# EAGLE board homeboard2 (EAGLE 6.0)
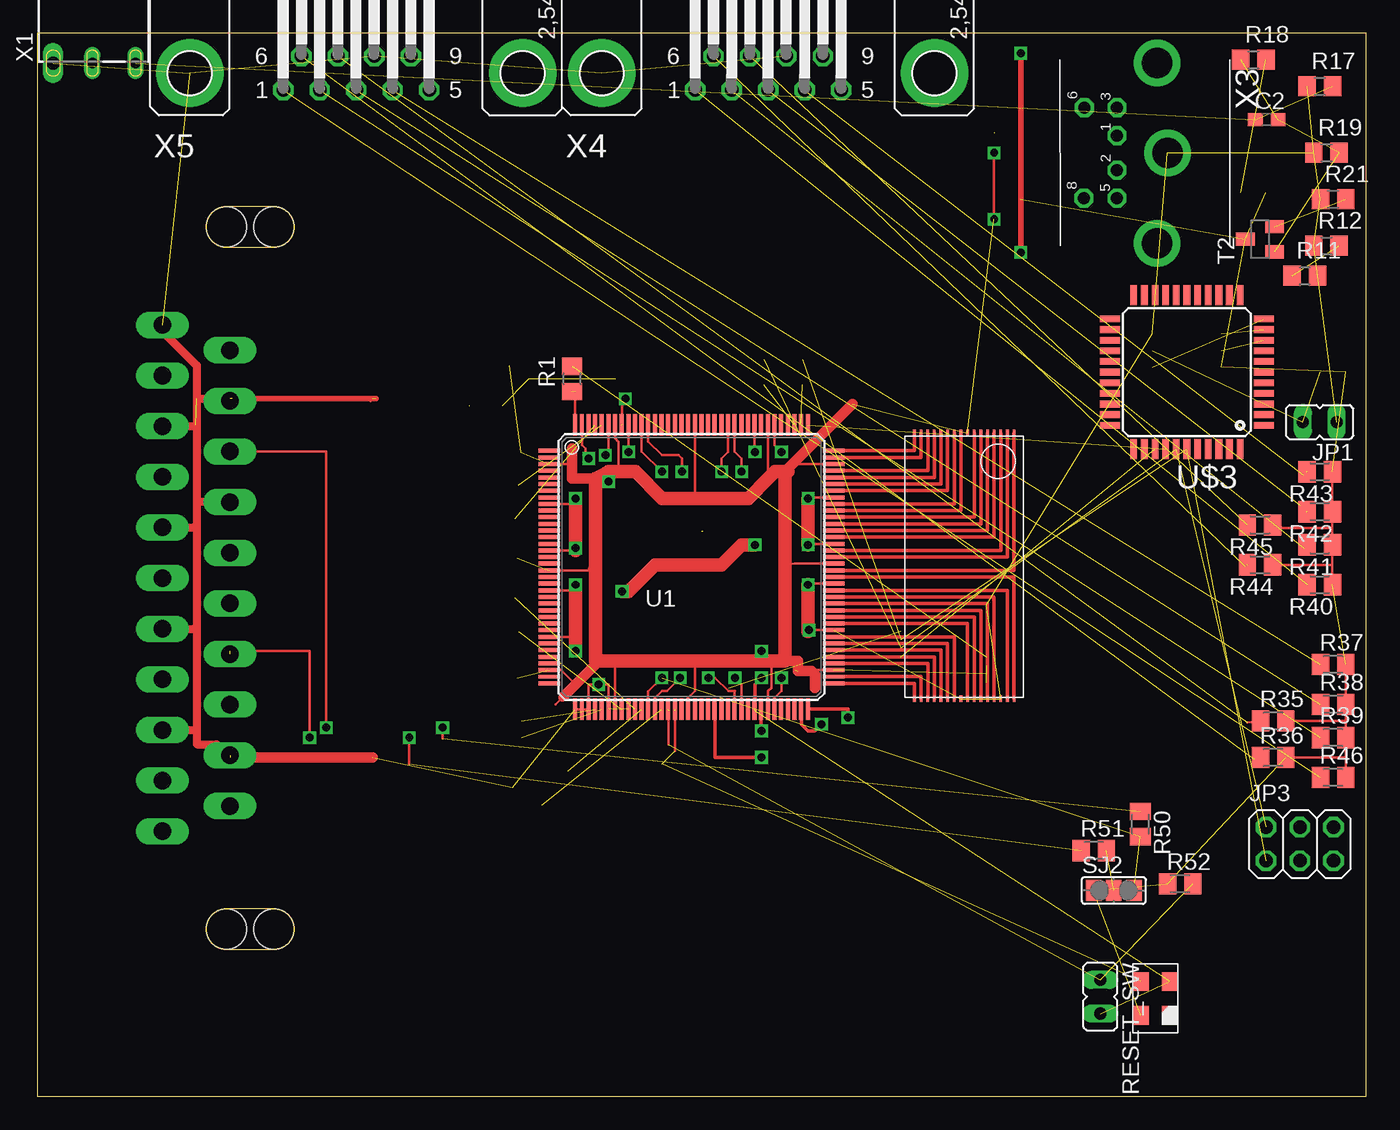
[diagram p0: board, top side]
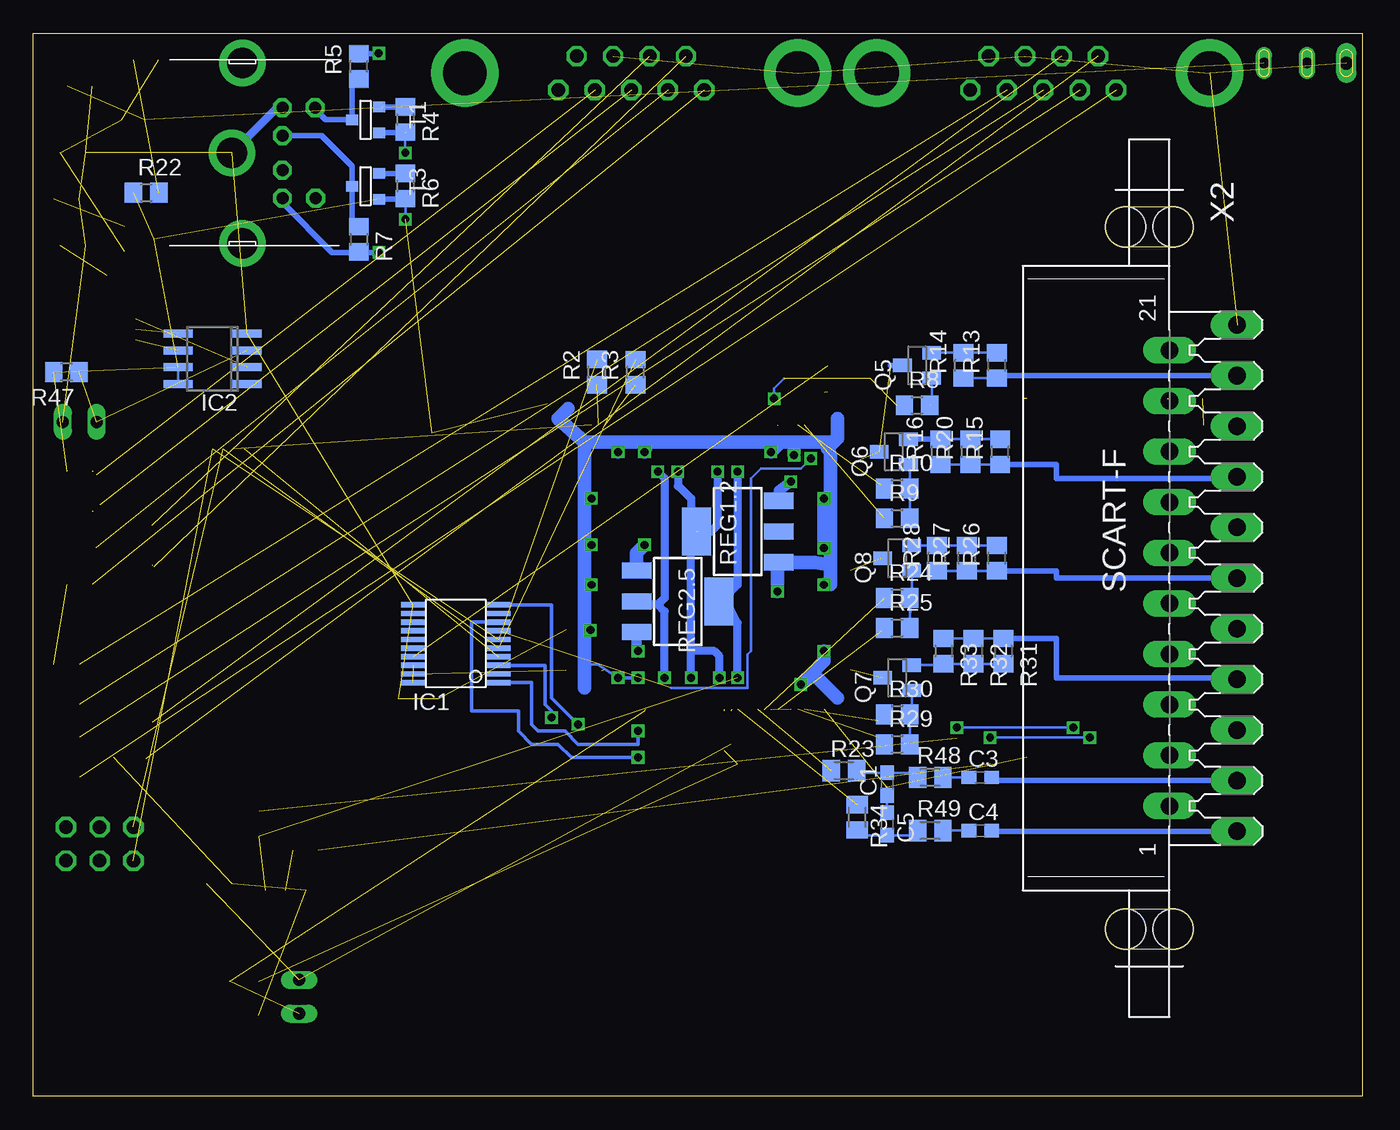
[diagram p1: board, bottom side, seen from below]

Size 100 x 80 mm. Coordinates in mm from the lower left corner, seen from the top.
Outline: 0,0 100,0 100,80 0,80 0,0
Copper layers (1*16): Top 0.0356mm / dielectric 1.5011mm / Bottom 0.0356mm
Design rules: minimum track width 6mil, minimum drill 13mil, track to track 6mil, track to pad 6mil, pad to pad 6mil, via to via 6mil, smd to smd 6mil, copper to edge 15mil, drill to drill 6mil, minimum pad ring 7mil, minimum via ring 7mil, stop-mask expansion 4mil, vias tented up to drill 0mil, thermal gap 10mil
Net classes: 1 power: width 0.6 mm, drill 1.1 mm, clearance 0.4 mm

## Footprints (pad centres in the part's own frame; a part is rotated, then mirrored left to right if it is on the bottom)
C0603 = smd 1.1 x 1: 1 -0.85,0; 2 0.85,0
VO20 = smd 0.4 x 1.8: 1 5.85,6.15; 2 5.2,6.15; 3 4.55,6.15; 4 3.9,6.15; 5 3.25,6.15; 6 2.6,6.15; 7 1.95,6.15; 8 1.3,6.15; 9 0.65,6.15; 10 0,6.15; 11 0,-0.3; 12 0.65,-0.3; 13 1.3,-0.3; 14 1.95,-0.3; 15 2.6,-0.3; 16 3.25,-0.3; 17 3.9,-0.3; 18 4.55,-0.3; 19 5.2,-0.3; 20 5.85,-0.3
SO-08 = smd 0.6 x 2.2: 1 -1.905,-2.6; 2 -0.635,-2.6; 3 0.635,-2.6; 4 1.905,-2.6; 5 1.905,2.6; 6 0.635,2.6; 7 -0.635,2.6; 8 -1.905,2.6
JP1 = drill 0.914 long: 1 0,-1.27; 2 0,1.27
2X03 = drill 1.016 octagon: 1 -2.54,-1.27; 2 -2.54,1.27; 3 0,-1.27; 4 0,1.27; 5 2.54,-1.27; 6 2.54,1.27
SOT23 = smd 1 x 1.4: 1 -0.95,-1.1; 2 0.95,-1.1; 3 0,1.1
R0805 = smd 1.3 x 1.5: 1 -0.95,0; 2 0.95,0
M0805 = smd 1.3 x 1.6: 1 -0.95,0; 2 0.95,0
SOT223 = smd 1.219 x 2.235: 1 -2.311,-3.099; 2 0,-3.099; 3 2.311,-3.099 | smd 3.6 x 2.2: 4 0,3.099
SJ_2 = smd 1.168 x 1.6: 1 -1.524,0; 2 0,0; 3 1.524,0
SOT-23 = smd 0.787 x 0.889: 1 0.025,-1.016; 2 -0.94,1.016; 3 0.991,1.016
TQ144 = smd 1.6 x 0.3: P1 -10.7,8.75; P2 -10.7,8.25; P3 -10.7,7.75; P4 -10.7,7.25; P5 -10.7,6.75; P6 -10.7,6.25; P7 -10.7,5.75; P8 -10.7,5.25; P9 -10.7,4.75; P10 -10.7,4.25; P11 -10.7,3.75; P12 -10.7,3.25; P13 -10.7,2.75; P14 -10.7,2.25; P15 -10.7,1.75; P16 -10.7,1.25; P17 -10.7,0.75; P18 -10.7,0.25; P19 -10.7,-0.25; P20 -10.7,-0.75; P21 -10.7,-1.25; P22 -10.7,-1.75; P23 -10.7,-2.25; P24 -10.7,-2.75; P25 -10.7,-3.25; P26 -10.7,-3.75; P27 -10.7,-4.25; P28 -10.7,-4.75; P29 -10.7,-5.25; P30 -10.7,-5.75; P31 -10.7,-6.25; P32 -10.7,-6.75; P33 -10.7,-7.25; P34 -10.7,-7.75; P35 -10.7,-8.25; P36 -10.7,-8.75; P73 10.7,-8.75; P74 10.7,-8.25; P75 10.7,-7.75; P76 10.7,-7.25; P77 10.7,-6.75; P78 10.7,-6.25; P79 10.7,-5.75; P80 10.7,-5.25; P81 10.7,-4.75; P82 10.7,-4.25; P83 10.7,-3.75; P84 10.7,-3.25; P85 10.7,-2.75; P86 10.7,-2.25; P87 10.7,-1.75; P88 10.7,-1.25; P89 10.7,-0.75; P90 10.7,-0.25; P91 10.7,0.25; P92 10.7,0.75; P93 10.7,1.25; P94 10.7,1.75; P95 10.7,2.25; P96 10.7,2.75; P97 10.7,3.25; P98 10.7,3.75; P99 10.7,4.25; P100 10.7,4.75; P101 10.7,5.25; P102 10.7,5.75; P103 10.7,6.25; P104 10.7,6.75; P105 10.7,7.25; P106 10.7,7.75; P107 10.7,8.25; P108 10.7,8.75 | smd 0.3 x 1.6: P37 -8.75,-10.7; P38 -8.25,-10.7; P39 -7.75,-10.7; P40 -7.25,-10.7; P41 -6.75,-10.7; P42 -6.25,-10.7; P43 -5.75,-10.7; P44 -5.25,-10.7; P45 -4.75,-10.7; P46 -4.25,-10.7; P47 -3.75,-10.7; P48 -3.25,-10.7; P49 -2.75,-10.7; P50 -2.25,-10.7; P51 -1.75,-10.7; P52 -1.25,-10.7; P53 -0.75,-10.7; P54 -0.25,-10.7; P55 0.25,-10.7; P56 0.75,-10.7; P57 1.25,-10.7; P58 1.75,-10.7; P59 2.25,-10.7; P60 2.75,-10.7; P61 3.25,-10.7; P62 3.75,-10.7; P63 4.25,-10.7; P64 4.75,-10.7; P65 5.25,-10.7; P66 5.75,-10.7; P67 6.25,-10.7; P68 6.75,-10.7; P69 7.25,-10.7; P70 7.75,-10.7; P71 8.25,-10.7; P72 8.75,-10.7; P109 8.75,10.7; P110 8.25,10.7; P111 7.75,10.7; P112 7.25,10.7; P113 6.75,10.7; P114 6.25,10.7; P115 5.75,10.7; P116 5.25,10.7; P117 4.75,10.7; P118 4.25,10.7; P119 3.75,10.7; P120 3.25,10.7; P121 2.75,10.7; P122 2.25,10.7; P123 1.75,10.7; P124 1.25,10.7; P125 0.75,10.7; P126 0.25,10.7; P127 -0.25,10.7; P128 -0.75,10.7; P129 -1.25,10.7; P130 -1.75,10.7; P131 -2.25,10.7; P132 -2.75,10.7; P133 -3.25,10.7; P134 -3.75,10.7; P135 -4.25,10.7; P136 -4.75,10.7; P137 -5.25,10.7; P138 -5.75,10.7; P139 -6.25,10.7; P140 -6.75,10.7; P141 -7.25,10.7; P142 -7.75,10.7; P143 -8.25,10.7; P144 -8.75,10.7
TSOP32 = smd 0.5 x 0.2: P1 -9.75,3.75; P2 -9.75,3.25; P3 -9.75,2.75; P4 -9.75,2.25; P5 -9.75,1.75; P6 -9.75,1.25; P7 -9.75,0.75; P8 -9.75,0.25; P9 -9.75,-0.25; P10 -9.75,-0.75; P11 -9.75,-1.25; P12 -9.75,-1.75; P13 -9.75,-2.25; P14 -9.75,-2.75; P15 -9.75,-3.25; P16 -9.75,-3.75; P17 10.25,-3.75; P18 10.25,-3.25; P19 10.25,-2.75; P20 10.25,-2.25; P21 10.25,-1.75; P22 10.25,-1.25; P23 10.25,-0.75; P24 10.25,-0.25; P25 10.25,0.25; P26 10.25,0.75; P27 10.25,1.25; P28 10.25,1.75; P29 10.25,2.25; P30 10.25,2.75; P31 10.25,3.25; P32 10.25,3.75
OSC_7C = smd 1.4 x 1.2: ENA -1.27,-1.1; GND 1.27,-1.1; OUT 1.27,1.1; VDD -1.27,1.1
TQFP44 = smd 1.5 x 0.5: 1 -5.8,4; 2 -5.8,3.2; 3 -5.8,2.4; 4 -5.8,1.6; 5 -5.8,0.8; 6 -5.8,0; 7 -5.8,-0.8; 8 -5.8,-1.6; 9 -5.8,-2.4; 10 -5.8,-3.2; 11 -5.8,-4; 23 5.8,-4; 24 5.8,-3.2; 25 5.8,-2.4; 26 5.8,-1.6; 27 5.8,-0.8; 28 5.8,0; 29 5.8,0.8; 30 5.8,1.6; 31 5.8,2.4; 32 5.8,3.2; 33 5.8,4 | smd 0.5 x 1.5: 12 -4,-5.8; 13 -3.2,-5.8; 14 -2.4,-5.8; 15 -1.6,-5.8; 16 -0.8,-5.8; 17 0,-5.8; 18 0.8,-5.8; 19 1.6,-5.8; 20 2.4,-5.8; 21 3.2,-5.8; 22 4,-5.8; 34 4,5.8; 35 3.2,5.8; 36 2.4,5.8; 37 1.6,5.8; 38 0.8,5.8; 39 0,5.8; 40 -0.8,5.8; 41 -1.6,5.8; 42 -2.4,5.8; 43 -3.2,5.8; 44 -4,5.8
1503_04 = drill 0.8 pad 1.2 long: 1 3.9,-10.25; 2 0.65,-10.25 | drill 1 pad 1.2 long: 3 -2.3,-10.25 | hole 1.6: 0,0
SCART-F = drill 1.321 long: 1 19.05,5.08; 2 17.145,0; 3 15.24,5.08; 4 13.335,0; 5 11.43,5.08; 6 9.525,0; 7 7.62,5.08; 8 5.715,0; 9 3.81,5.08; 10 1.905,0; 11 0,5.08; 12 -1.905,0; 13 -3.81,5.08; 14 -5.715,0; 15 -7.62,5.08; 16 -9.525,0; 17 -11.43,5.08; 18 -13.335,0; 19 -15.24,5.08; 20 -17.145,0; 21 -19.05,5.08 | hole 3.023: 26.416,0.254; 26.416,-3.302; -26.416,0.254; -26.416,-3.302
M_DIN6 = drill 0.9 pad 1.422 octagon: 1 -1.3,-3.75; 2 1.3,-3.75; 3 -3.4,-3.75; 5 3.4,-3.75; 6 -3.4,-6.2; 8 3.4,-6.25 | drill 2.3 pad 3.5: SH1 6.8,-0.75; SH2 0,0.05; SH3 -6.75,-0.75
F09HP = drill 1.016 octagon: 1 -5.486,-1.27; 2 -2.743,-1.27; 3 0,-1.27; 4 2.743,-1.27; 5 5.486,-1.27; 6 -4.115,1.27; 7 -1.372,1.27; 8 1.372,1.27; 9 4.115,1.27 | drill 3.302 pad 5.08: G1 -12.522,0; G2 12.522,0

## Placement (x,y rotation side)
C1  [C0603]  35.75,23.5 90 bottom
C2  100nF  [C0603]  92.5,73.5 0 top
C3  [C0603]  28.75,24 0 bottom
C4  [C0603]  28.75,20 0 bottom
C5  [C0603]  35.75,20.5 270 bottom
IC1  XCF02S  [VO20]  71.13,36.98 270 bottom
IC2  25LC080SN  [SO-08]  86.5,55.5 90 bottom
JP1  [JP1]  96.5,50.75 90 top
JP3  [2X03]  95,19 0 top
Q5  BC848SMD  [SOT23]  33.5,55 90 bottom
Q6  BC848SMD  [SOT23]  35.25,48.5 90 bottom
Q7  BC848SMD  [SOT23]  35,31.5 90 bottom
Q8  BC848SMD  [SOT23]  35,40.5 90 bottom
R1  100  [R0805]  40.25,53.99 90 top
R2  100  [R0805]  57.58,54.5 90 bottom
R3  100  [R0805]  54.68,54.49 90 bottom
R4  1000  [R0805]  72,73.5 270 bottom
R5  1000  [R0805]  75.5,77.5 90 bottom
R6  1000  [R0805]  72,68.5 270 bottom
R7  1000  [R0805]  75.5,64.5 270 bottom
R8  2200  [R0805]  33.5,52 0 bottom
R9  2200  [R0805]  35,43.5 0 bottom
R10  1000  [R0805]  35,45.75 0 bottom
R11  75  [R0805]  95.38,61.75 0 top
R12  750  [R0805]  97,64 0 top
R13  680  [R0805]  27.5,55 90 bottom
R14  2200  [R0805]  30,55 90 bottom
R15  270  [R0805]  27.25,48.5 90 bottom
R16  680  [R0805]  31.75,48.5 90 bottom
R17  10000  [R0805]  96.5,76 0 top
R18  4700  [R0805]  91.5,78 0 top
R19  10000  [R0805]  97,71 0 top
R20  4700  [R0805]  29.5,48.5 90 bottom
R21  47000  [R0805]  97.5,67.5 0 top
R22  1000  [R0805]  91.5,68 0 bottom
R23  [M0805]  39,24.5 0 bottom
R24  2200  [R0805]  35,37.5 0 bottom
R25  1000  [R0805]  35,35.25 0 bottom
R26  270  [R0805]  27.5,40.5 90 bottom
R27  680  [R0805]  29.75,40.5 90 bottom
R28  4700  [R0805]  32,40.5 90 bottom
R29  2200  [R0805]  35,26.5 0 bottom
R30  1000  [R0805]  35,28.75 0 bottom
R31  270  [R0805]  27,33.5 270 bottom
R32  680  [R0805]  29.25,33.5 270 bottom
R33  4700  [R0805]  31.5,33.5 270 bottom
R34  [M0805]  38,21 270 bottom
R35  [M0805]  93,28.25 0 top
R36  [M0805]  93,25.5 0 top
R37  [M0805]  97.5,32.5 0 top
R38  [M0805]  97.5,29.5 0 top
R39  [M0805]  97.5,27 0 top
R40  [M0805]  96.5,38.5 180 top
R41  [M0805]  96.5,41.5 180 top
R42  [M0805]  96.5,44 180 top
R43  [M0805]  96.5,47 180 top
R44  [M0805]  92,40 180 top
R45  [M0805]  92,43 180 top
R46  [M0805]  97.5,24 0 top
R47  4K7  [R0805]  97.5,54.5 180 bottom
R48  [M0805]  32.5,24 0 bottom
R49  [M0805]  32.5,20 0 bottom
R50  2k2  [M0805]  83,20.5 270 top
R51  2k2  [M0805]  79.5,18.5 0 top
R52  4K7  [M0805]  86,16 0 top
REG1.2  1.2V  [SOT223]  47,42.5 90 bottom
REG2.5  2.5V  [SOT223]  51.5,37.25 270 bottom
RESET_SW  [JP1]  80,7.5 180 top
SJ2  [SJ_2]  81,15.5 0 top
T1  BSS138  [SOT-23]  75,73.5 270 bottom
T2  BC848  [SOT23]  92,64.5 90 top
T3  BSS138  [SOT-23]  75,68.5 270 bottom
U1  XC3S400TQ144  [TQ144]  49.23,39.83 0 top
U$1  AS6C4008  [TSOP32]  69.75,40.17 270 top
U$2  TXO_7C  [OSC_7C]  84.12,7.38 90 top
U$3  ATMEGA32U4-AU  [TQFP44]  86.5,54.5 180 top
X1  1503_04  [1503_04]  3.5,88 0 top
X2  SCART-F  [SCART-F]  14.5,39 270 bottom
X3  [M_DIN6]  85,71 270 top
X4  [F09HP]  55,77 0 top
X5  [F09HP]  24,77 0 top

## Library data of the parts
C1-C5 R23 R34-R46 R48-R52 = resistor
IC1 = smd-special
IC2 = microchip; MF: MICROCHIP; MPN: 25LC080/SN; OC_FARNELL: 1137302; OC_NEWARK: 96K4092
JP1 RESET_SW SJ2 = jumper
JP3 = pinhead
Q5-Q8 = bc548
R1-R22 R24-R33 R47 = rcl
REG1.2 REG2.5 U$1 U$2 = cpcfpga
T1 T3 = zetex; OC_FARNELL: unknown; OC_NEWARK: unknown
T2 = transistor
U1 = xilinx_spartan3_virtex4_and_5
U$3 = adafruit
X1 = con-lumberg; OC_FARNELL: 1216981; OC_NEWARK: unknown
X2 = con-hirschmann; OC_FARNELL: unknown; OC_NEWARK: unknown
X3 = mini_din
X4 X5 = con-subd; OC_FARNELL: unknown; OC_NEWARK: unknown

## Nets
AINLEFT: X2.6
AINRIGHT: X2.2
B0: R30.1 U1.P40
B1: R29.1 U1.P41
CASIN: R21.2 T2.2
CLK_5V: R5.1 T1.1 X3.6
COMPIN: X2.20
CSYNC: R8.1 U1.P137
D_FASTBLANKING: R11.1 R12.2
DATA_5V: R7.1 T3.1 X3.1
FPGA_AUDIO_LEFT: R23.1 U1.P47
FPGA_AUDIO_RIGHT: R34.1 U1.P50
G0: R25.1 U1.P44
G1: R24.1 U1.P46
GND: C1.1 C5.1 IC1.11 IC2.4 JP1.1 R12.1 R17.1 R19.1 R21.1 REG1.2.1 REG2.5.1 RESET_SW.2 U1.P9 U1.P16 U1.P22 U1.P29 U1.P37 U1.P38 U1.P39 U1.P42 U1.P45 U1.P64 U1.P67 U1.P81 U1.P88 U1.P94 U1.P101 U1.P114 U1.P117 U1.P136 U1.P139 U$1.P24 U$1.P30 U$2.GND X1.3 X2.4 X2.5 X2.9 X2.13 X2.14 X2.17 X2.18 X2.21 X3.3 X3.SH2 X4.8 X4.G1 X5.8 X5.G1
MISO: IC2.2 U$3.11
MOSI: IC2.5 U$3.10
N$1: U1.P108 U$1.P16
N$2: U1.P107 U$1.P15
N$3: U1.P105 U$1.P14
N$4: U1.P104 U$1.P13
N$5: U1.P103 U$1.P12
N$6: U1.P102 U$1.P11
N$7: U1.P100 U$1.P10
N$8: U1.P99 U$1.P9
N$9: U1.P98 U$1.P7
N$10: U1.P97 U$1.P6
N$11: U1.P96 U$1.P5
N$12: U1.P95 U$1.P4
N$13: U1.P93 U$1.P3
N$14: U1.P92 U$1.P2
N$15: U1.P90 U$1.P1
N$16: U1.P73 U$1.P17
N$17: U1.P74 U$1.P18
N$18: U1.P76 U$1.P19
N$19: U1.P77 U$1.P20
N$20: U1.P78 U$1.P21
N$21: U1.P79 U$1.P22
N$22: U1.P80 U$1.P23
N$23: U1.P82 U$1.P25
N$24: U1.P83 U$1.P26
N$25: U1.P84 U$1.P27
N$26: U1.P85 U$1.P28
N$27: U1.P86 U$1.P29
N$28: U1.P87 U$1.P31
N$29: U1.P89 U$1.P32
N$30: R35.1 X5.7
N$31: R36.1 X5.6
N$32: R37.1 X5.4
N$33: R38.1 X5.3
N$34: R39.1 X5.2
N$35: IC1.3 U1.P72
N$36: IC1.17 R1.2
N$37: R46.1 X5.1
N$38: IC1.10 U1.P71
N$39: R2.1 U1.P110
N$40: IC1.7 U1.P143
N$41: R40.2 X4.1
N$42: R1.1 U1.P144
N$43: R3.1 U1.P111
N$44: R41.2 X4.2
N$45: R42.2 X4.3
N$46: R43.2 X4.4
N$47: R44.2 X4.6
N$48: R45.2 X4.7
N$49: IC2.3 JP1.2 R47.1
N$50: U1.P52 U$2.OUT
N$51: C1.2 R23.2 R48.1
N$52: C3.1 R48.2
N$53: Q6.1 R9.2 R10.2
N$54: Q6.2 R15.2 R16.2 R20.2
N$55: Q8.1 R24.2 R25.2
N$56: Q8.2 R26.2 R27.2 R28.2
N$57: Q7.1 R29.2 R30.2
N$58: Q7.2 R31.2 R32.2 R33.2
N$59: Q5.2 R13.2 R14.2
N$60: C2.2 R18.1 R19.2 T2.1
N$61: C2.1 R17.2 X1.1
N$62: R18.2 R22.2
N$63: Q5.1 R8.2
N$64: C4.1 R49.2
N$65: C5.2 R34.2 R49.1
N$66: R51.2 SJ2.2
N$67: U1.P26
N$68: JP3.3
N$69: JP3.5
N$70: JP3.6
N$72: JP3.4
N$73: U1.P12
PE1: X3.SH1
PE3: X3.SH3
PROM_DO: IC1.1 U1.P65
PROM_INITB: IC1.8 U1.P58
PS2CLK: R4.1 T1.2
PS2DAT: R6.1 T3.2
R0: R10.1 U1.P140
R1: R9.1 U1.P141
RESET: R52.2 RESET_SW.1 U1.P51
SCART_BLANKING: R50.1 X2.16
SCART_BLUE: R31.1 R32.1 R33.1 X2.7
SCART_COMP: R13.1 R14.1 X2.19
SCART_GREEN: R26.1 R27.1 R28.1 X2.11
SCART_LEFT: C3.2 X2.3
SCART_MODE: R51.1 X2.8
SCART_RED: R15.1 R16.1 R20.1 X2.15
SCART_RIGHT: C4.2 X2.1
SCLK: IC2.6 U$3.9
SPI_SEL0: IC2.1
SPI_SEL1: U$3.8
TCK: IC1.6 JP3.1 R2.2 U$3.39
TDI: IC1.4 U$3.36
TDO: U1.P109 U$3.37
TMS: IC1.5 JP3.2 R3.2 U$3.38
VCC: IC1.18 IC1.19 IC1.20 IC2.7 IC2.8 Q5.3 Q6.3 Q7.3 Q8.3 R4.2 R6.2 R22.1 R35.2 R36.2 R37.2 R38.2 R39.2 R40.1 R41.1 R42.1 R43.1 R44.1 R45.1 R46.2 R47.2 R52.1 REG1.2.3 REG2.5.3 SJ2.1 T1.3 T2.3 T3.3 U1.P3 U1.P19 U1.P34 U1.P43 U1.P54 U1.P66 U1.P75 U1.P91 U1.P106 U1.P115 U1.P126 U1.P138 U$1.P8 U$2.VDD
VCC_5V: R5.2 R7.2 X3.5
VCC_B3: R11.2
VCCAUX: R50.2 REG2.5.4 SJ2.3 U1.P48 U1.P134
VCCAUX_R: REG2.5.2 U1.P62 U1.P120
VCCINT: REG1.2.4 U1.P49 U1.P61 U1.P121 U1.P133

## Tracks (layer width: path | path; a pad name or v marks a point on that pad's centre or on a via)
B0  (1 unrouted)
  Bottom 0.2: 35.95,28.5 R30.1 36.45,28.25
B1  (1 unrouted)
  Bottom 0.2: 36.45,27 R29.1 35.95,27
CASIN  (1 unrouted)
CLK_5V
  Bottom 0.3: 76.02,76.03 R5.1
  Bottom 0.4: X3.6 78.8,74.3 78,73.5 76.04,73.5 T1.1 76.02,76.03
CSYNC  (via drill 0.6)  (3 unrouted)
  Top 0.2: 44,50.5 44,52.25 v44.25,52.5
  Bottom 0.2: 34.45,52.5 R8.1 35,52 | 43.5,54 44.25,53.25 v44.25,52.5
D_FASTBLANKING  (1 unrouted)
DATA_5V
  Bottom 0.4: R7.1 76.02,65.97 T3.1 76,68.49 76,70 78.3,72.3 X3.1
FPGA_AUDIO_LEFT  (1 unrouted)
FPGA_AUDIO_RIGHT  (1 unrouted)
G0  (1 unrouted)
  Bottom 0.2: 36.2,35 R25.1
G1  (1 unrouted)
GND  (via drill 0.6)  (26 unrouted)
  Top 0.2: U1.P9 40.5,44.58 40.5,44.5 | U1.P16 40.5,41.08 40.5,41 | U1.P22 40.5,38.08 40.5,38 | U1.P29 40.5,34.58 | U1.P37 U1.P38 U1.P39 41.5,29.16 41.5,31 v42.25,31 43,31 | 43,29.16 U1.P42 42.98,30.98 | U1.P136 44.5,50.51 v44.5,48.5 | U1.P139 42.98,48.48 v42.75,48.25 | 25.09,52.34 25.25,52.5 | U1.P101 58.08,45.08 v58,45 | U1.P88 58.08,38.58 v58,38.5 | U1.P81 v58.08,35.08 58,35 | U1.P94 58.08,41.58 v58,41.5 | U1.P117 53.98,48.52 v54,48.5 | U1.P114 55.48,49.02 v56,48.5 | U1.P67 55.48,29.98 56,30.5 v56,31.5
  Top 0.254: 54,29 54,31 v54.5,31.5
  Top 0.4: X2.21 9.42,57.58 | 12.21,44.72 12,44.5 | 25.5,52.5 14.66,52.5
  Top 0.406: 11.81,42.81 12,43 | 11.81,35.19 12,35 | 11.93,50.43 11.93,50.5 11.86,50.43 | 11.93,27.57 12,27.5
  Top 0.6: 9.42,57.58 12,55 12,52.5 | 12,52.5 12,44.5 12,43 12,35 12,27.5 12,26.5 13.5,26.5 14.5,25.5 | X2.13 11.81,42.81 | X2.9 11.81,35.19 | X2.17 11.86,50.43 | X2.5 11.93,27.57 | 40.5,44.58 v40.5,45 | X2.14 12.21,44.72 | 12,52.5 14.5,52.5
  Top 0.8: 40.5,41 v40.5,41.25 | v40.5,38.5 40.5,38 | 14.5,25.5 25.25,25.5 | 14.66,52.5 X2.18
  Top 1: 40.5,38 40.5,34.58 v40.5,33.5 | 40.5,41.08 40.5,44.5 | v54,41.5 53,41.5 51.5,40 46.5,40 44.5,38 v44,38 | v58,45 v58,41.5 | v58,38.5 58,35
  Bottom 0.2: 35.75,21.75 35.5,21.5 36,21.5 35.85,21.35 C5.1 C1.1 35.75,23.25 | v58,45 58.5,44.25 | v58,38.5 58.5,38.25 | v58,41.5 58.5,41.25 | v58.08,35.08 58.42,35.08 58.5,34.75 | v56,31.5 57.5,32.5 58.5,32.5 | 42.75,48.75 43,49.25
  Bottom 0.254: v54.5,31.5 v56,31.5
  Bottom 0.6: X3.3 81.65,74.4 X3.SH2 | 41.25,31.75 41.5,31.75
  Bottom 0.8: 44,40.09 REG1.2.1 | 40,49.25 40,48.25 40.25,48.75
  Bottom 1: v40.5,41.25 40,45.5 | 40,45 40,41.25 | v40.5,41.25 40,41.25 | 40,41.25 40,40 | 40,40 40,38.5 v40.5,38.5 | v42.25,31 41.5,31.75 40.5,32.75 v40.5,33.5 | 40,45 v40.5,45 v40.5,41.25 | 40,45 40,45.5 | 40,45.5 40,48.25 | 40,49.25 43,49.25 43.75,49.25 | 39.5,30 41.25,31.75 | REG1.2.1 41.19,40.19 40,40 | REG2.5.1 54.6,40.9 v54,41.5 | v44,38 44,40.09 | 53.75,49.25 43.75,49.25 | 43.75,49.25 v44.5,48.5 | 56,49.25 58.5,49.25 | 58.5,49.25 58.5,44.25 58.5,41.25 58.5,38.25 58.5,34.75 58.5,32.5 58.5,30.75 | v54,48.5 53.75,49.25 | 53.75,49.25 56,49.25 | 56,49.25 v56,48.5 | 58.5,49.25 60.5,51 59.75,51.75 | v42.75,48.25 42.75,48.75 | 39.5,51 39.5,49.5 40.25,48.75
MISO  (1 unrouted)
MOSI  (1 unrouted)
N$1
  Top 0.254: U1.P108 66,48.58 U$1.P16
N$2
  Top 0.254: U1.P107 66.5,48.08 U$1.P15
N$3
  Top 0.254: U1.P105 67,47.08 U$1.P14
N$4
  Top 0.254: U1.P104 67.5,46.58 U$1.P13
N$5
  Top 0.254: U1.P103 68,46.08 U$1.P12
N$6
  Top 0.254: U1.P102 68.5,45.58 U$1.P11
N$7
  Top 0.254: U1.P100 69,44.58 U$1.P10
N$8
  Top 0.254: U1.P99 69.5,44.08 U$1.P9
N$9
  Top 0.254: U1.P98 70.5,43.58 U$1.P7
N$10
  Top 0.254: U1.P97 71,43.08 U$1.P6
N$11
  Top 0.254: U1.P96 71.5,42.58 U$1.P5
N$12
  Top 0.254: U1.P95 72,42.08 U$1.P4
N$13
  Top 0.254: U1.P93 72.5,41.08 U$1.P3
N$14
  Top 0.254: U1.P92 73,40.58 U$1.P2
N$15
  Top 0.254: U1.P90 73.5,39.58 U$1.P1
N$16
  Top 0.254: U1.P73 66,31.08 U$1.P17
N$17
  Top 0.254: U1.P74 66.5,31.58 U$1.P18
N$18
  Top 0.254: U1.P76 67,32.58 U$1.P19
N$19
  Top 0.254: U1.P77 67.5,33.08 U$1.P20
N$20
  Top 0.254: U1.P78 68,33.58 U$1.P21
N$21
  Top 0.254: U1.P79 68.5,34.08 U$1.P22
N$22
  Top 0.254: U1.P80 69,34.58 U$1.P23
N$23
  Top 0.254: U1.P82 70,35.58 U$1.P25
N$24
  Top 0.254: U1.P83 70.5,36.08 U$1.P26
N$25
  Top 0.254: U1.P84 71,36.58 U$1.P27
N$26
  Top 0.254: U1.P85 71.5,37.08 U$1.P28
N$27
  Top 0.254: U1.P86 72,37.58 U$1.P29
N$28
  Top 0.254: U1.P87 73,38.08 U$1.P31
N$29
  Top 0.254: U1.P89 73.5,39.08 U$1.P32
N$30  (1 unrouted)
  Top 0.2: 91.05,28.13 R35.1
N$31  (1 unrouted)
  Top 0.2: 91.55,25.39 R36.1
N$32  (1 unrouted)
N$33  (1 unrouted)
N$34  (1 unrouted)
  Top 0.2: 96.55,26.88 R39.1
N$35  (via drill 0.6)
  Top 0.2: 58,29.16 U1.P72
  Top 0.254: 58,29.16 61,29.16 v61,28.5
  Bottom 0.254: v61,28.5 61,29 61.5,29.5 61.5,32.43 IC1.3
N$36  (1 unrouted)
N$37  (1 unrouted)
N$38  (via drill 0.6)
  Top 0.254: U1.P71 57.5,29.13 57.5,28 58,27.5 58.5,27.5 v59,28
  Bottom 0.254: v59,28 61,30 61,36.98 IC1.10
N$39  (1 unrouted)
N$40  (via drill 0.6)  (1 unrouted)
  Top 0.2: U1.P143 40.98,49.02 41.25,48.75 41.25,48.25 v41.5,48
  Bottom 0.2: 52,30.75 46.25,30.75 46.25,33.25 46,33.5 46,46.5 45.25,47.25 42.25,47.25 v41.5,48
N$41  (1 unrouted)
  Top 0.2: 95.54,38.51 R40.2
N$42  (1 unrouted)
  Top 0.2: U1.P144 40.48,53 40,53
N$43  (1 unrouted)
N$44  (1 unrouted)
  Top 0.2: 95.31,41.26 R41.2
N$45  (2 unrouted)
  Top 0.2: 95,44.5 95.5,44
N$46  (2 unrouted)
  Top 0.2: 95.24,46.74 95.5,47
N$47  (2 unrouted)
  Top 0.2: 90.89,39.88 91,40
N$48  (1 unrouted)
N$49  (2 unrouted)
N$50  (3 unrouted)
  Top 0.2: 48,26 48,29
N$51
  Bottom 0.2: R23.2 37.7,24.35 C1.2 33.8,24.35 R48.1
N$52
  Bottom 0.2: R48.2 C3.1
N$53
  Bottom 0.2: Q6.1 34.05,47.55 R10.2 R9.2
N$54
  Bottom 0.2: R15.2 R20.2 R16.2
  Bottom 0.4: Q6.2 32.05,49.45 32,49.5 31.8,49.5 R16.2
N$55
  Bottom 0.2: Q8.1 33.9,37.6 34,37.5 R25.2 R24.2
N$56
  Bottom 0.2: R26.2 R27.2 R28.2 Q8.2
N$57
  Bottom 0.2: R29.2 R30.2 33.9,28.75 Q7.1
N$58
  Bottom 0.2: Q7.2 31.5,32.45 R33.2 R32.2 R31.2
N$59
  Bottom 0.2: R13.2 R14.2 Q5.2
N$60  (3 unrouted)
N$61  (2 unrouted)
N$62  (1 unrouted)
N$63  (1 unrouted)
  Bottom 0.2: Q5.1 32.4,52.1 32.5,52
N$64
  Bottom 0.2: C4.1 R49.2
N$65
  Bottom 0.2: R49.1 33.8,19.65 C5.2 37.7,19.65 R34.2
N$66  (1 unrouted)
PROM_DO  (via drill 0.6)
  Top 0.254: U1.P65 54.48,27.52 v54.5,27.5
  Bottom 0.254: v54.5,27.5 54.5,26.5 59,26.5 60,27.5 62,27.5 62.5,28 62.5,31.13 IC1.1
PROM_INITB  (via drill 0.6)
  Top 0.254: v54.5,25.5 51,25.5 51,29.11 U1.P58
  Bottom 0.254: IC1.8 67,35.68 67,29 63.5,29 63.5,27.5 62.5,26.5 60.5,26.5 59.5,25.5 v54.5,25.5
PS2CLK
  Bottom 0.4: T1.2 R4.1
PS2DAT
  Bottom 0.4: R6.1 T3.2
R0  (1 unrouted)
  Bottom 0.2: 36.2,46 R10.1
R1  (1 unrouted)
RESET  (3 unrouted)
  Top 0.2: 47.5,26.5 47.5,29
SCART_BLANKING  (via drill 0.6)  (1 unrouted)
  Top 0.2: 30.5,26.95 v30.5,27.75 | X2.16 21.75,48.52 v21.75,27.75
  Bottom 0.2: v21.75,27.75 v30.5,27.75
SCART_BLUE
  Bottom 0.2: R31.1 R32.1 R33.1
  Bottom 0.4: R31.1 23,34.45 23,31.5 9.54,31.5 X2.7
SCART_COMP
  Bottom 0.2: R14.1 R13.1 27.5,54
  Bottom 0.4: X2.19 27.26,54.24 27.5,54
SCART_GREEN
  Bottom 0.2: R28.1 R27.1 R26.1
  Bottom 0.4: R26.1 23,39.55 23,39 X2.11
SCART_LEFT
  Bottom 0.2: 27.66,23.76 C3.2
  Bottom 0.4: X2.3 27.66,23.76
SCART_MODE  (via drill 0.6)  (2 unrouted)
  Top 0.2: 28,25 v28,27 | v20.5,27 20.5,33.5 14.5,33.5
  Top 0.4: 14.5,33 14.5,33.5
  Bottom 0.2: v28,27 v20.5,27
SCART_RED
  Bottom 0.2: R15.1 R20.1 R16.1
  Bottom 0.4: R15.1 23,47.55 23,46.5 9.54,46.5 X2.15
SCART_RIGHT
  Bottom 0.2: 27.85,19.95 C4.2
  Bottom 0.4: X2.1 27.85,19.95
SCLK  (1 unrouted)
TCK  (3 unrouted)
TDI  (1 unrouted)
TDO  (1 unrouted)
TMS  (3 unrouted)
VCC  (via drill 0.6)  (20 unrouted)
  Top 0.2: R46.2 98.45,25.5 | 98.45,25.5 R39.2 98.45,28.25 | 98.45,28.25 R38.2 R37.2 | R35.2 98.45,28.25 | R36.2 98.45,25.5 | R40.1 97.45,40 | 97.45,40 R41.1 97.45,42.62 | 97.45,42.62 R42.1 R43.1 | R44.1 97.45,40 | R45.1 93.38,43 93.62,42.75 97.33,42.75 97.45,42.62 | 43.5,29.13 U1.P43 43.48,32.75 43.48,32.98 43.5,33 | U1.P19 41.5,39.58 42,41 | v72,71 v72,66 | U1.P75 57,32.08 | U1.P106 57,47.58 56.5,47 | U1.P91 57,40.08 56.25,40 | U1.P34 39.42,32.08 40.5,31 | 39,29.5 39.5,30 | U1.P66 55,29.13 55,30.5 55.25,30.75 55.25,32.75 | U1.P126 49.48,45.02 49.5,45 | U1.P115 55,50.53 55,46.5 | U1.P54 48.98,29.98 49.5,30.5 49.5,32.5 49.75,32.5 50,32.75 | 53.5,32.5 54,33 54.5,33 54.75,33 55,32.75 | U1.P3 39.92,47.58 40,47.5 40.25,47.5 | U1.P138 43.48,49.52 43.75,49.25 43.75,47 | 40.25,46.5 40.25,47.25 40.5,47.5
  Top 0.6: 39.5,30 39.62,30.12 | 42,32.75 42,32.5
  Top 0.8: 43.75,47 43.5,47 | 39.62,30.12 40.5,31 42,32.5 | 42,46.5 40.25,46.5 40.25,47.5 40.25,48.75 | v54.5,33.5 54.5,33 | v43,46.25 43,47 | 58.5,30.75 58.5,31.75 58.25,32 57.25,32 57.25,32.75 56.25,32.75 | 61.34,52.09 56.25,47
  Top 1: 56.25,47 56.25,40 56.25,32.75 55.25,32.75 55,32.75 50,32.75 43.48,32.75 42,32.75 42,41 42,46.5 43,47 43.5,47 43.48,47.02 | 56.25,47 56.5,47 | 56.25,47 55.5,47 55,46.5 53.5,45 49.5,45 47,45 45,47 43.75,47
  Bottom 0.2: 71.55,72.55 71.55,72.95 71.5,73 | 72.01,72.51 v72.01,71.01 v72,71 | v72,66 R6.2 | IC2.7 IC2.8 | Q5.3 34.6,54.9
  Bottom 0.4: T1.3 72.01,72.51 72,72.5 | T3.3 72.04,67.51 R6.2 | R4.2 71.55,72.55 71.5,72.5 | Q5.3 35.5,55 | 54.6,33.6 v54.5,33.5
  Bottom 0.8: REG2.5.3 54.6,33.6 | REG1.2.3 43.9,45.6 v43,46.25
VCC_5V  (via drill 0.6)
  Top 0.4: v74,78.5 v74,63.5
  Bottom 0.4: X3.5 81.25,67.25 77.5,63.5 75.55,63.5 R7.2 75.5,63.5 v74,63.5 | R5.2 74.05,78.45 v74,78.5
VCCAUX  (via drill 0.6)  (2 unrouted)
  Top 0.2: U1.P48 45.98,30.48 v47,31.5 | U1.P134 45.48,48.52 v47,47
  Bottom 0.2: 47.95,37.45 REG2.5.4
  Bottom 0.6: v47,47 47,38.5 48,37.5 47.95,37.45 47,35.62 v47,31.5
VCCAUX_R  (via drill 0.6)
  Top 0.2: U1.P62 52.98,30.98 53,31 v52.5,31.5 | U1.P120 52.48,48.52 53,48 v53,47
  Bottom 0.6: v53,47 52.5,46.5 52.5,37.5 53,37 | 53,37 54.5,37 54.6,37.1 REG2.5.2 | v52.5,31.5 52.5,36.5 53,37
VCCINT  (via drill 0.6)  (1 unrouted)
  Top 0.2: U1.P49 46.48,29.98 47,30.5 47.38,30.5 v48.38,31.5 | U1.P61 52.48,30.48 52.5,30.5 52,30.5 51,31.5 v50.5,31.5 | U1.P133 45.98,49.27 47,48.25 48.25,48.25 48.5,48 v48.5,47 | U1.P121 51.98,48.48 51.5,48 v51.5,47
  Bottom 0.2: 50.5,42.1 REG1.2.4 50.1,42.9 50,43
  Bottom 0.6: v50.5,31.5 50.5,33.5 | 50.5,33.5 50.5,42.1 | v48.38,31.5 48.38,33.12 48.75,33.5 50.5,33.5 | v51.5,47 51.5,45.9 51.4,45.9 50.5,45 50.5,44 49.5,43 50,42.5 | v48.5,47 48.5,43 49,42.5 REG1.2.4